# Altium PCB PCB1.PcbDoc
Units mil, origin at the board's own origin, x right, y up, seen from the top; angles counter-clockwise.
Board outline 1230.03 x 695.03 mil, 2 copper layers (Top Layer, Bottom Layer); 10 components, 7 nets, 28 pads, 6 vias.
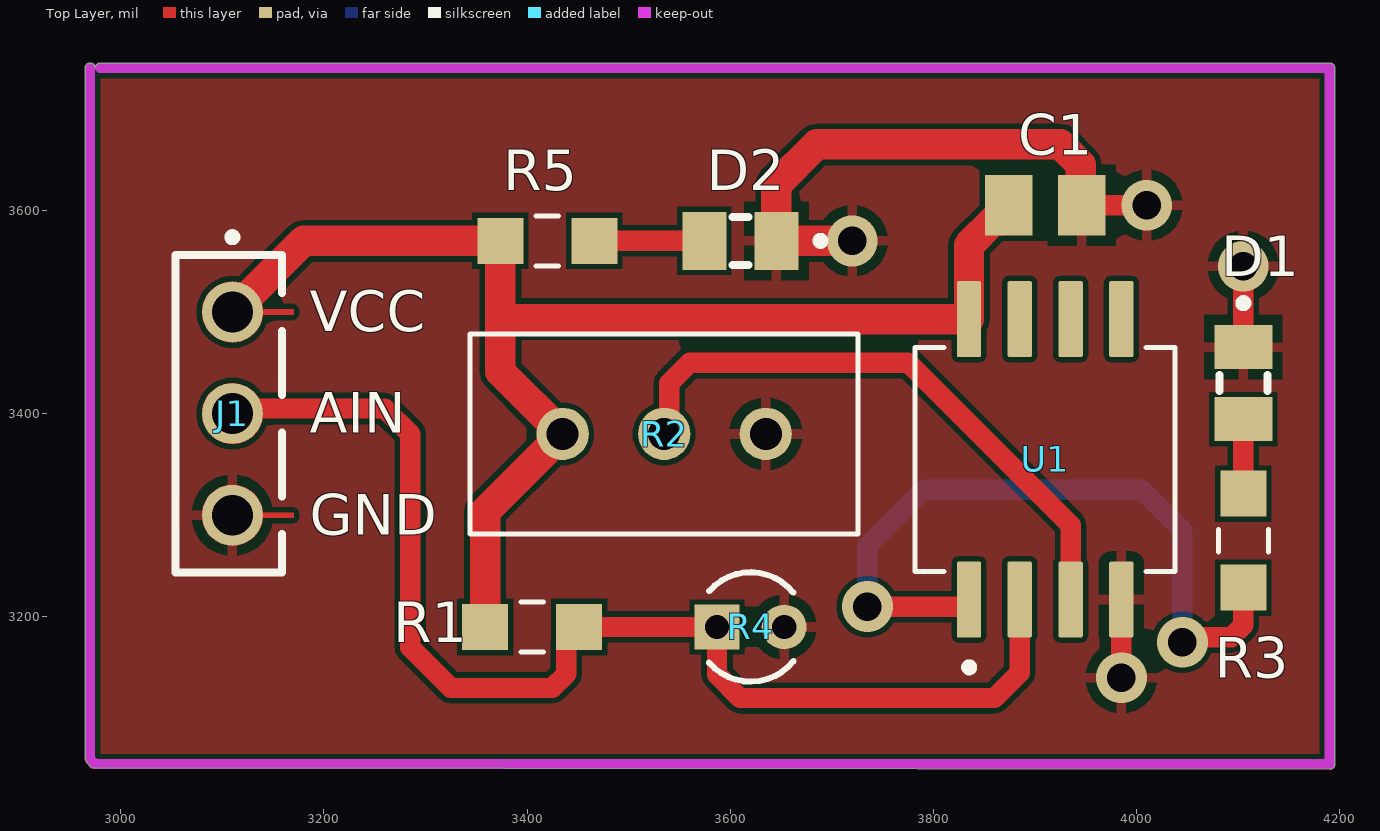
[diagram p0: Top Layer view]
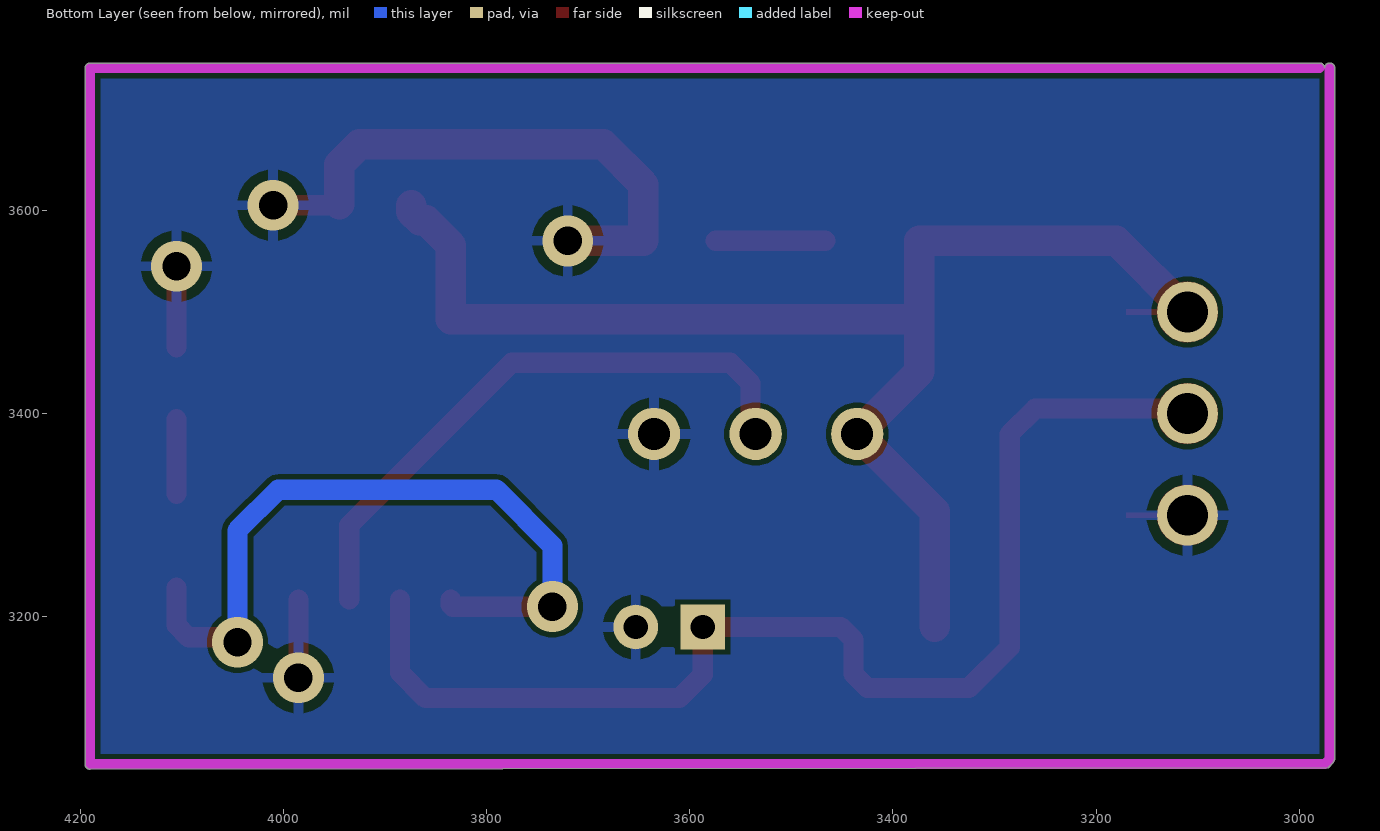
[diagram p1: Bottom Layer view, seen from below]
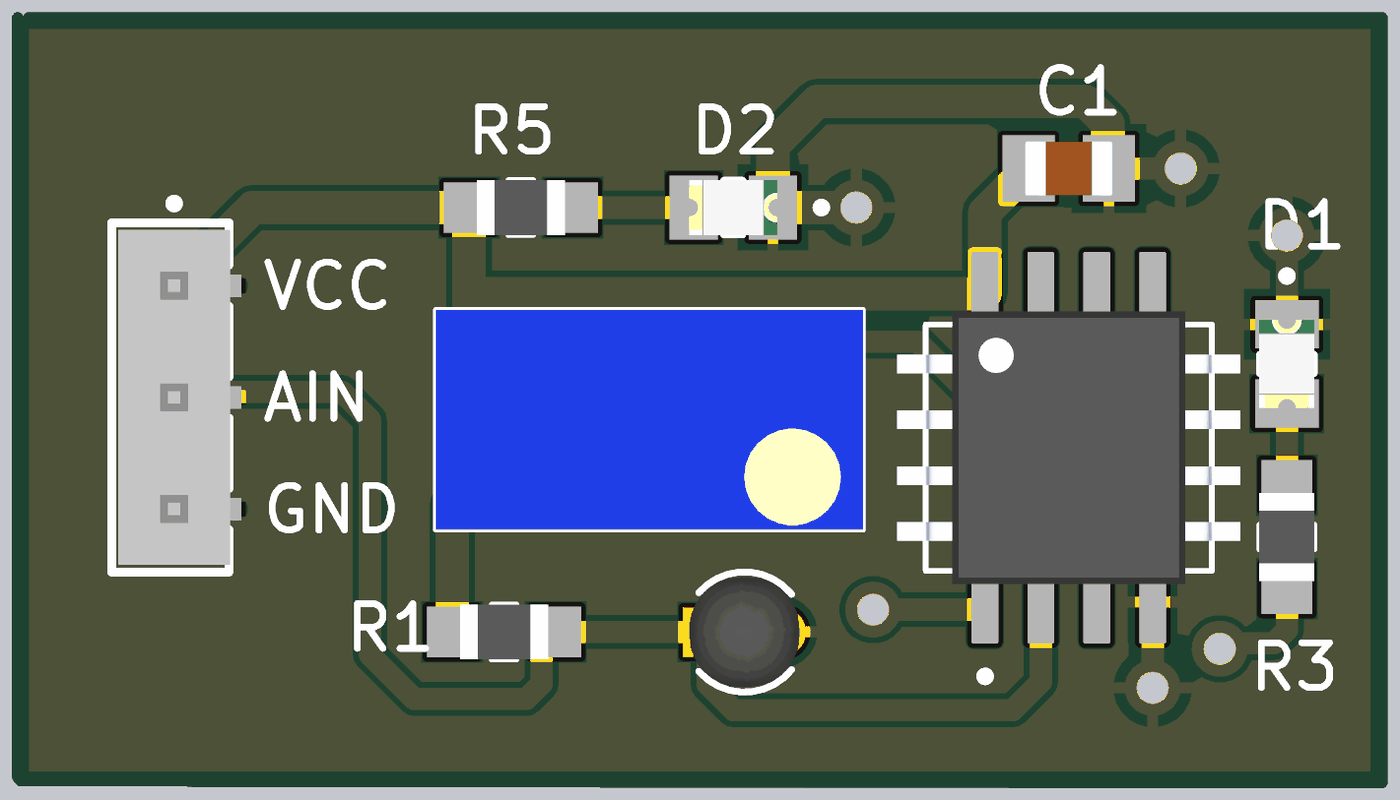
[diagram p2: 3D render of the assembled board from above, using the file's embedded part models]

## Layer stack, top to bottom
Top Solder: solder mask 0.4, Solder Resist, Dk 3.5
Top Layer: signal copper 1.4
Dielectric 1: dielectric 12.6, FR-4, Dk 4.8
Bottom Layer: signal copper 1.4
Bottom Solder: solder mask 0.4, Solder Resist, Dk 3.5

## Board outline
2971.45,3051.45 2966.45,3056.45 2964.99,3060 2964.99,3740 cw(c2970,3740) 2975,3740.39 cw(c2980,3740) 2980,3745.01 4190,3745.01 cw(c4190,3740) 4195.02,3740 4195.02,3055 cw(c4190,3055) 4190,3049.99

## Design rules (kind name [scope] priority, off if disabled: settings)
Clearance [All] p1: gap=5 ignorepadtopadclearanceinfootprint=FALSE
PolygonConnect [All] p1: connectstyle=Relief reliefconductorwidth=10 reliefentries=4 polygonreliefangle="90 Angle" airgapwidth=10
RoutingVias [All] p1: holewidth=34 width=17 viastyle="Through Hole" minholewidth=17 minwidth=34 maxholewidth=25 maxwidth=50
SilkToSolderMaskClearance [IsPad] p1: minsilkscreentomaskgap=3 clearancetoexposedcopper=TRUE
SolderMaskExpansion [All] p1: expansion=4 istentingtop=FALSE
SupplyNets "Schematic Supply Nets_1" [InNet('VCC')] p1: voltage=0.000
SupplyNets "Schematic Supply Nets" [InNet('GND')] p2: voltage=0.000
Width [All] p1: maxlimit=30 minlimit=10 preferedwidth=20 minimp=50.000000 maximp=50.000000 favimp=50.000000
29 further rules are at their usual default settings.

## Components (designator, comment, footprint, x,y, rotation, side; value= is the part's Value field where it differs from the comment)
C1 "CEU4J2X7R1H104K125AE" CAPC2012X150N 3910,3605 r0 top
D1 "597-3305-607F" LEDC2012X70N 4105,3430 r270 top
D2 "597-3305-607F" LEDC2012X70N 3610,3570 r180 top
J1 "MTLW-103-XX-XX-S-XXX" SAMTEC_MTLW-103-XX-XX-S-XXX 3110,3400 r90 top
R1 "10K" RES_ERJU06J102V 3405,3190 r180 top
R2 "T93YA103KT20" TRIM_T93YA103KT20 3535,3380 r270 top
R3 "1K" RES_ERJU06J102V 4105,3275 r90 top
R4 "MF52A1103F3380" TRES_MF52-A_CTM 3620,3190 r0 top
R5 "1K" RES_ERJU06J102V 3420,3570 r0 top
U1 "LM358PSR" SOIC127P780X200-8N 3910,3355 r90 top

## Footprints (in the part's own frame and the unit in brackets; to place one, negate y for a bottom-side part, rotate by r counter-clockwise, add the part's x,y. Pads: shape width x height; smd on the part's side, far side on the other; paste and mask are expansions set on the pad)
CAPC2012X150N [mm]
  rect 1.19x1.51 smd: 1(-0.911,0) 2(0.911,0)
  body extent -1,-0.63 1,0.63, height 1.5
LEDC2012X70N [mm]
  rect 1.1x1.45 smd: A(0.9,0) C(-0.9,0)
  silkscreen extent -2.1,-0.6 0.2,0.6, body extent -1,-0.63 1,0.63, height 0.7
RES_ERJU06J102V [mm]
  rect 1.15x1.15 smd: 1(-1.175,0) 2(1.175,0)
  silkscreen extent -0.28,-0.63 0.28,0.63, body extent -1,-0.63 1,0.63, height 0.6
SAMTEC_MTLW-103-XX-XX-S-XXX [mm]
  round 1.52 hole 1.02: 01(2.54,0) 02(0,0) 03(-2.54,0)
  Top Layer region: 2.619,0.756 2.698,0.743 2.775,0.723 2.849,0.694 2.92,0.658 2.987,0.615 3.049,0.565 3.105,0.509 3.155,0.447 3.198,0.38 3.234,0.309 3.263,0.235 3.283,0.158 3.296,0.079 3.3,0 3.299,-0.038 3.296,-0.076 3.292,-0.113 3.285,-0.151 3.277,-0.187 3.267,-0.224 3.255,-0.259 3.241,-0.294 3.226,-0.329 3.209,-0.363 3.19,-0.395 3.17,-0.427 3.148,-0.458 3.125,-0.487 3.1,-0.516 3.074,-0.543 3.046,-0.569 3.017,-0.593 2.988,-0.616 2.957,-0.638 2.925,-0.658 2.892,-0.676 2.858,-0.692 2.823,-0.707 2.788,-0.721 2.752,-0.732 2.716,-0.742 2.679,-0.75 2.642,-0.756 2.605,-0.76 2.605,-1.53 2.475,-1.53 2.475,-0.76 2.438,-0.756 2.401,-0.75 2.364,-0.742 2.328,-0.732 2.292,-0.721 2.257,-0.707 2.222,-0.692 2.188,-0.676 2.155,-0.658 2.123,-0.638 2.092,-0.616 2.063,-0.593 2.034,-0.569 2.006,-0.543 1.98,-0.516 1.955,-0.487 1.932,-0.458 1.91,-0.427 1.89,-0.395 1.871,-0.363 1.854,-0.329 1.839,-0.294 1.825,-0.259 1.813,-0.224 1.803,-0.187 1.795,-0.151 1.788,-0.113 1.784,-0.076 1.781,-0.038 1.78,0 1.784,0.079 1.797,0.158 1.817,0.235 1.846,0.309 1.882,0.38 1.925,0.447 1.975,0.509 2.031,0.565 2.093,0.615 2.16,0.658 2.231,0.694 2.305,0.723 2.382,0.743 2.461,0.756 2.54,0.76
  Top Layer region: 0.079,0.756 0.158,0.743 0.235,0.723 0.309,0.694 0.38,0.658 0.447,0.615 0.509,0.565 0.565,0.509 0.615,0.447 0.658,0.38 0.694,0.309 0.723,0.235 0.743,0.158 0.756,0.079 0.76,0 0.759,-0.038 0.756,-0.076 0.752,-0.113 0.745,-0.151 0.737,-0.187 0.727,-0.224 0.715,-0.259 0.701,-0.294 0.686,-0.329 0.669,-0.363 0.65,-0.395 0.63,-0.427 0.608,-0.458 0.585,-0.487 0.56,-0.516 0.534,-0.543 0.506,-0.569 0.477,-0.593 0.448,-0.616 0.417,-0.638 0.385,-0.658 0.352,-0.676 0.318,-0.692 0.283,-0.707 0.248,-0.721 0.212,-0.732 0.176,-0.742 0.139,-0.75 0.102,-0.756 0.065,-0.76 0.065,-1.53 -0.065,-1.53 -0.065,-0.76 -0.102,-0.756 -0.139,-0.75 -0.176,-0.742 -0.212,-0.732 -0.248,-0.721 -0.283,-0.707 -0.318,-0.692 -0.352,-0.676 -0.385,-0.658 -0.417,-0.638 -0.448,-0.616 -0.477,-0.593 -0.506,-0.569 -0.534,-0.543 -0.56,-0.516 -0.585,-0.487 -0.608,-0.458 -0.63,-0.427 -0.65,-0.395 -0.669,-0.363 -0.686,-0.329 -0.701,-0.294 -0.715,-0.259 -0.727,-0.224 -0.737,-0.187 -0.745,-0.151 -0.752,-0.113 -0.756,-0.076 -0.759,-0.038 -0.76,0 -0.756,0.079 -0.743,0.158 -0.723,0.235 -0.694,0.309 -0.658,0.38 -0.615,0.447 -0.565,0.509 -0.509,0.565 -0.447,0.615 -0.38,0.658 -0.309,0.694 -0.235,0.723 -0.158,0.743 -0.079,0.756 0,0.76
  Top Layer region: -2.461,0.756 -2.382,0.743 -2.305,0.723 -2.231,0.694 -2.16,0.658 -2.093,0.615 -2.031,0.565 -1.975,0.509 -1.925,0.447 -1.882,0.38 -1.846,0.309 -1.817,0.235 -1.797,0.158 -1.784,0.079 -1.78,0 -1.781,-0.038 -1.784,-0.076 -1.788,-0.113 -1.795,-0.151 -1.803,-0.187 -1.813,-0.224 -1.825,-0.259 -1.839,-0.294 -1.854,-0.329 -1.871,-0.363 -1.89,-0.395 -1.91,-0.427 -1.932,-0.458 -1.955,-0.487 -1.98,-0.516 -2.006,-0.543 -2.034,-0.569 -2.063,-0.593 -2.092,-0.616 -2.123,-0.638 -2.155,-0.658 -2.188,-0.676 -2.222,-0.692 -2.257,-0.707 -2.292,-0.721 -2.328,-0.732 -2.364,-0.742 -2.401,-0.75 -2.438,-0.756 -2.475,-0.76 -2.475,-1.53 -2.605,-1.53 -2.605,-0.76 -2.642,-0.756 -2.679,-0.75 -2.716,-0.742 -2.752,-0.732 -2.788,-0.721 -2.823,-0.707 -2.858,-0.692 -2.892,-0.676 -2.925,-0.658 -2.957,-0.638 -2.988,-0.616 -3.017,-0.593 -3.046,-0.569 -3.074,-0.543 -3.1,-0.516 -3.125,-0.487 -3.148,-0.458 -3.17,-0.427 -3.19,-0.395 -3.209,-0.363 -3.226,-0.329 -3.241,-0.294 -3.255,-0.259 -3.267,-0.224 -3.277,-0.187 -3.285,-0.151 -3.292,-0.113 -3.296,-0.076 -3.299,-0.038 -3.3,0 -3.296,0.079 -3.283,0.158 -3.263,0.235 -3.234,0.309 -3.198,0.38 -3.155,0.447 -3.105,0.509 -3.049,0.565 -2.987,0.615 -2.92,0.658 -2.849,0.694 -2.775,0.723 -2.698,0.743 -2.619,0.756 -2.54,0.76
  silkscreen extent -3.97,-1.24 4.51,1.42, body extent -3.81,-1.27 3.81,1.27, height 8.38
SOIC127P780X200-8N [mm]
  rrect15% 1.9x0.61 smd: 1(-3.505,1.905) 2(-3.505,0.635) 3(-3.505,-0.635) 4(-3.505,-1.905) 5(3.505,-1.905) 6(3.505,-0.635) 7(3.505,0.635) 8(3.505,1.905)
  silkscreen extent -5.3,-3.25 2.8,3.25, body extent -3.9,-3.1 3.9,3.1, height 2
TRES_MF52-A_CTM [mil]
  rect 44x44 / inner round 44 / far side rect 44x44 hole 24: 1(-33,0)
  round 44 hole 24: 2(33,0)
  silkscreen extent -41,-54 42,54, body extent -49,-49 49,49, height 157
TRIM_T93YA103KT20 [mm]
  round 1.308 hole 0.8: A(0,2.54) B(0,0) C(0,-2.54)
  silkscreen extent -2.5,-4.85 2.5,4.85, body extent -2.5,-4.85 2.5,4.85, height 11.1

## Part data
C1: "0.1 ÂµF Â±10% 50V Ceramic Capacitor X7R 0805 (2012 Metric)", Package="2012 TDK", Availability="In Stock", Check_prices=https://www.snapeda.com/parts/CEU4J2X7R1H104K125AE/TDK/view-part/?ref=eda, MF=TDK, MP=CEU4J2X7R1H104K125AE, Price=None, Purchase-URL=https://pricing.snapeda.com/search/part/CEU4J2X7R1H104K125AE/?ref=eda, SnapEDA_Link=https://www.snapeda.com/parts/CEU4J2X7R1H104K125AE/TDK/view-part/?ref=snap
D1 D2: "LED Uni-Color Green 4-Pin Chip 0805 T/R", Package=None, Availability=Unavailable, MP=597-3305-607F, Price=None
J1: "Connector Header Through Hole 40 position 0.100\" (2.54mm)", Package=None, Availability=Unavailable, MP=MTLW-103-XX-XX-S-XXX, Price=None
R1 R3 R5: library part ERJU06J102V, Package=None, Availability=Unavailable, MP=ERJU06J102V, Price=None
R2: "10 kOhms 0.5W, 1/2W PC Pins Through Hole Trimmer Potentiometer Cermet 21.0 Turn Top Adjustment", Package="TSOP-32338 Vishay", Check_prices=https://www.snapeda.com/parts/T93YA103KT20/Vishay+Sfernice/view-part/?ref=eda, MF=Vishay, MP=T93YA103KT20, SnapEDA_Link=https://www.snapeda.com/parts/T93YA103KT20/Vishay+Sfernice/view-part/?ref=snap
R4: "THERMISTOR NTC 10KOHM 3380K BEAD", Package="Bead Cantherm", Check_prices=https://www.snapeda.com/parts/MF52A1103F3380/Cantherm/view-part/?ref=eda, MF=Cantherm, MP=MF52A1103F3380, SnapEDA_Link=https://www.snapeda.com/parts/MF52A1103F3380/Cantherm/view-part/?ref=snap
U1: "Dual, 30-V, 700-kHz operational amplifier", Package="SOP-8 Texas Instruments", Check_prices=https://www.snapeda.com/parts/LM358PSR/Texas+Instruments/view-part/?ref=eda, MF="Texas Instruments", MP=LM358PSR, SnapEDA_Link=https://www.snapeda.com/parts/LM358PSR/Texas+Instruments/view-part/?ref=snap

## Via types
v1: diameter 50, hole 28, Top Layer to Bottom Layer, tented both sides, 6 vias

## Nets (pads, with @x,y where several pads share a name; then routed paths per layer and width w, separated by ;. In a path a pad name is that pad's centre, name@x,y a point inside that pad or via, vN(x,y) a via of type N, cw(c..) or ccw(c..) an arc to the next point about the centre after c; other vN are vias at no path point)
AIN: J1.02 R1.1 R4.1 U1.2 | length 1197.5
  Top Layer w20: J1.02 3115,3405 3260,3405 3285,3380 3285,3170 3325,3130 3425,3130 3438.62,3143.62 3438.62,3177.36 R1.1 R4.1 3587,3143 3610,3120 3860,3120 3885,3145 U1.2
GND: C1.2 D1.C D2.C J1.03 R2.A R4.2 U1.4 | length 722.6
  Top Layer w20: R2.A@3635,3371.48 R2.A ; C1.2 v1(4010,3605) ; v1(3985,3140) U1.4 ; D1.C v1(4105,3545)
  Top Layer w30: v1(3720,3570) D2.C 3645.43,3625.43 3685,3665 3925,3665 3945,3645 C1.2@3945,3605.87
NetD1_A: D1.A R3.2 | length 73.3
  Top Layer w20: R3.2 D1.A
NetD2_A: D2.A R5.2 | length 108.3
  Top Layer w20: R5.2 D2.A
NetR2_B: R2.B U1.3 | length 594.6
  Top Layer w20: R2.B 3540,3385 3540,3430 3560,3450 3775,3450 3935,3290 U1.3
NetR3_1: R3.1 U1.1 | length 729.1
  Top Layer w20: v1(3735,3210) 3832.99,3210 3835,3212.01 U1.1 ; v1(4045,3175) 4050,3180 4093.28,3180 4105,3191.72 R3.1
  Bottom Layer w20: v1(3735,3210) 3735,3270 3790,3325 4005,3325 4045,3285 v1(4045,3175)
VCC: C1.1 J1.01 R1.2 R2.C R5.1 U1.8 | length 1323.7
  Top Layer w20: 3373.74,3495 3375.75,3492.99
  Top Layer w30: J1.01 3180,3570 R5.1 3373.74,3495 3373.74,3441.26 R2.C 3358.74,3303.74 R1.2 ; 3375.75,3492.99 U1.8 3835,3565.87 3859.41,3590.28 3865.71,3590.28 3874.13,3598.7 C1.1
pads on no net: U1.5 U1.6 U1.7

## Polygon pours and split planes (outlines as drawn)
GND on Top Layer "Top Layer - GND" (solid, remove dead copper, pour order 0): 2971.45,3051.45 2966.45,3056.45 2964.99,3060 2964.99,3740 cw(c2970,3740) 2975,3740.39 cw(c2980,3740) 2980,3745.01 4190,3745.01 cw(c4190,3740) 4195.02,3740 4195.02,3055 cw(c4190,3055) 4190,3049.99
GND on Bottom Layer "Bottom Layer - GND" (solid, remove dead copper, pour order 1): 2971.45,3051.45 2966.45,3056.45 2964.99,3060 2964.99,3740 cw(c2970,3740) 2975,3740.39 cw(c2980,3740) 2980,3745.01 4190,3745.01 cw(c4190,3740) 4195.02,3740 4195.02,3055 cw(c4190,3055) 4190,3049.99

## Keep-outs
Keep-Out Layer:
  lines w10: 2970,3740 2970,3060 2975,3055 4190,3055 4190,3740 2980,3740

## Silkscreen, mask and mechanical layers (free items; w line width, h text height)
Top Overlay:
  text "VCC" at 3186,3481 h40
  text "AIN" at 3186,3381 h40
  text "GND" at 3186,3281 h40
Mechanical 1:
  the board outline again, w5